# EAGLE board stm v0.5 (EAGLE 9.4.2), part 1 of 2
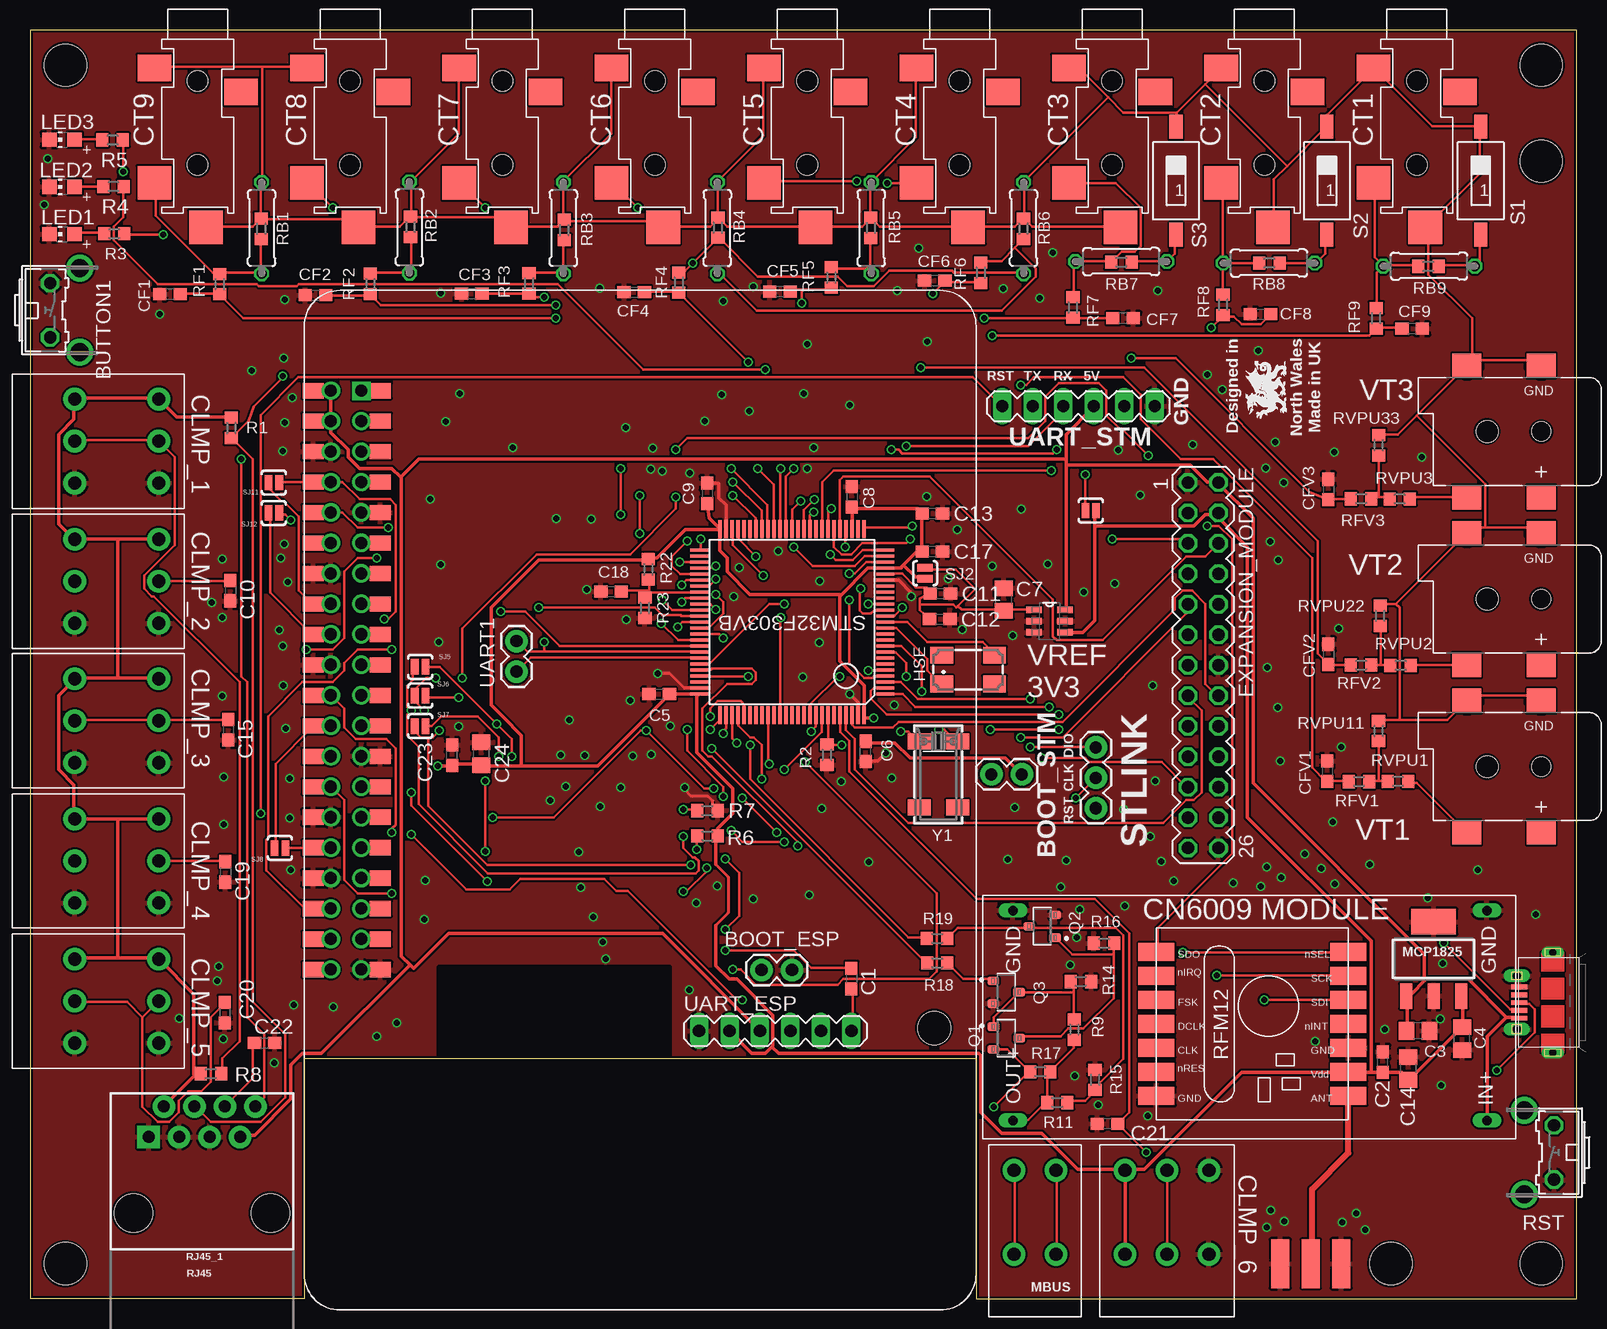
[diagram p0: board, top side]
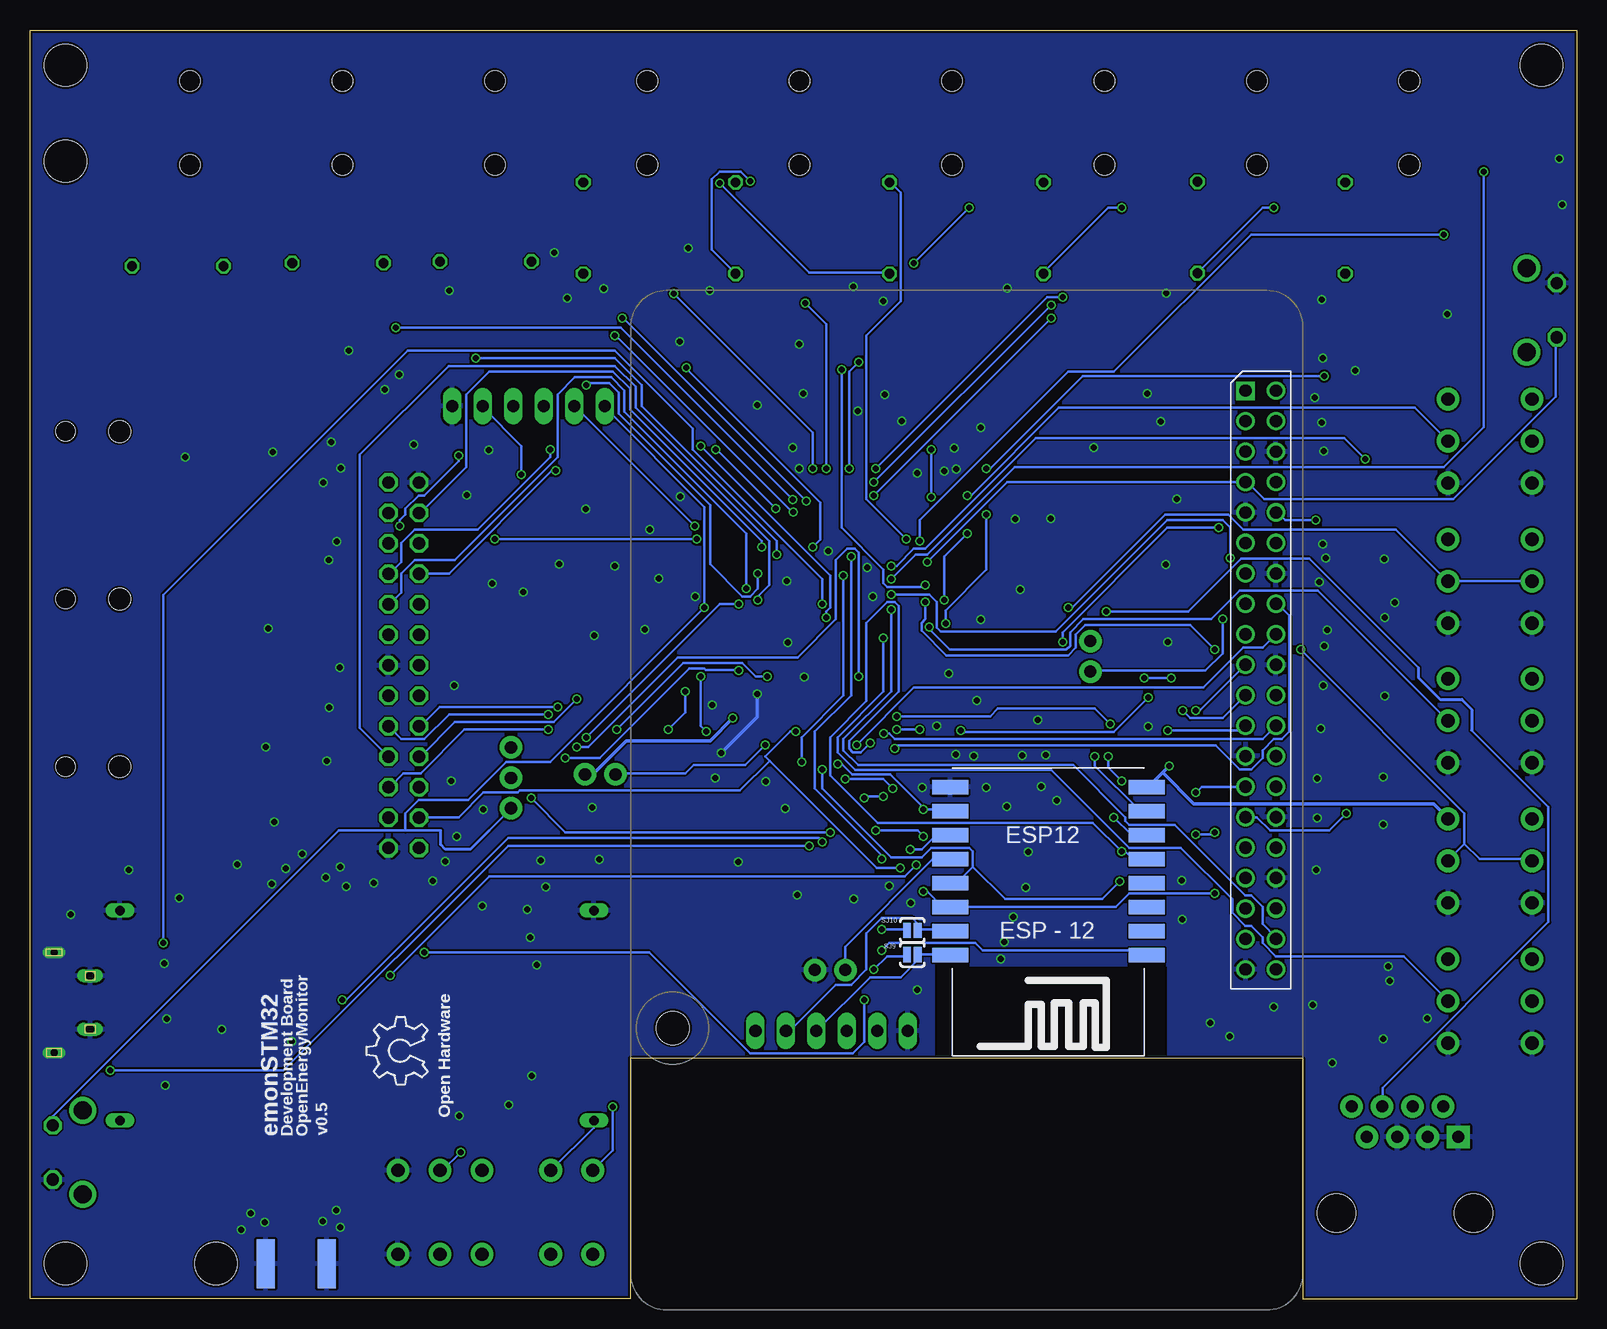
[diagram p1: board, bottom side, seen from below]

Size 128.91 x 105.79 mm. Coordinates in mm from the lower left corner, seen from the top.
Outline: 128.91,105.79 0,105.79 0,0 22.86,0 22.86,20.07 78.87,20.07 78.87,0 128.91,0 128.91,105.79
Copper layers (1*16): Top 0.035mm / dielectric 1.53mm / Bottom 0.035mm
Design rules "ragworm": minimum track width 7mil, minimum drill 0.5mm, track to track 6mil, track to pad 6mil, pad to pad 7mil, via to via 8mil, smd to smd 0mil, copper to edge 8mil, drill to drill 10mil, minimum pad ring 3mil, minimum via ring 3mil, stop-mask expansion 2mil, vias tented up to drill 25mil, thermal gap 8mil
Net classes: 0 default: width 0.203 mm, drill 0.5 mm, clearance 0.152 mm; 1 power: width 0.254 mm, drill 0.5 mm, clearance 0.152 mm; 2 gnd: width 0.203 mm, drill 0.5 mm, clearance 0.152 mm
Holes 3.5 mm at 125.95,102.85 2.95,102.85 2.95,2.95 125.95,2.95 125.95,94.85 113.41,2.95
tRestrict: area 34,19.3 to 53.3,27.7
bRestrict: area 34.2,19.3 to 53.5,27.7

## Footprints (pad centres in the part's own frame; a part is rotated, then mirrored left to right if it is on the bottom)
OMNIMATE_LSF_2 = drill 1.1 pad 1.9: P$1 -3.5,-3.5; P$2 -3.5,3.5; P$3 0,-3.5; P$4 0,3.5
OMNIMATE_LSF_3 = drill 1.1 pad 1.9: P$1 -3.5,-3.5; P$2 -3.5,3.5; P$3 0,-3.5; P$4 0,3.5; P$5 3.5,-3.5; P$6 3.5,3.5
1X02 = drill 1.016 pad 1.88: 1 0,0; 2 2.54,0
B3F-31XX = drill 1.016 octagon: 1 -2.261,-1.245; 2 2.261,-1.245 | drill 1.499 pad 2.159: 3 -3.505,1.245; 4 3.505,1.245
C0603 = smd 1.1 x 1: 1 -0.85,0; 2 0.85,0
C0805 = smd 1.3 x 1.5: 1 -0.95,0; 2 0.95,0
STEREO_SMT = smd 2.8 x 2.2: P$1 -3.6,-2.4; P$3 3.6,-4.4 | smd 2.8 x 2.8: P$2 -3.6,-12; P$4 0.7,-15.7 | hole 1.7: 0,-3.5; 0,-10.5
ESP12-SMD = smd 3 x 1.2: ADC -8.3,3.8; CH_PD -8.3,1.8; GND 8.1,-8.2; GPIO0 8.1,-2.2; GPIO2 8.1,-4.2; GPIO4 8.1,-0.2; GPIO5 8.1,1.8; GPIO12 -8.3,-4.2; GPIO13 -8.3,-6.2; GPIO14 -8.3,-2.2; GPIO15 8.1,-6.2; GPIO16 -8.3,-0.2; RESET -8.3,5.8; RXD0 8.1,3.8; TXD0 8.1,5.8; VCC -8.3,-8.2
MA13-2 = drill 1.016 octagon: 1 -15.24,-1.27; 2 -15.24,1.27; 3 -12.7,-1.27; 4 -12.7,1.27; 5 -10.16,-1.27; 6 -10.16,1.27; 7 -7.62,-1.27; 8 -7.62,1.27; 9 -5.08,-1.27; 10 -5.08,1.27; 11 -2.54,-1.27; 12 -2.54,1.27; 13 0,-1.27; 14 0,1.27; 15 2.54,-1.27; 16 2.54,1.27; 17 5.08,-1.27; 18 5.08,1.27; 19 7.62,-1.27; 20 7.62,1.27; 21 10.16,-1.27; 22 10.16,1.27; 23 12.7,-1.27; 24 12.7,1.27; 25 15.24,-1.27; 26 15.24,1.27
CTS406 = smd 1.9 x 1.4: 1 -2.2,-1.2; 2 2.2,-1.2; 3 2.2,1.2; 4 -2.2,1.2
SMA-EDGE = smd 1.524 x 4.064: GND@0 0,0; GND@1 5.08,0; SIG 2.54,0 | smd 1.524 x 4.064 bottom: GND@2 0,0; GND@3 5.08,0
CHIP-LED0805 = smd 1.2 x 1.2: A 0,-1.05; C 0,1.05
SOT-223 = smd 1 x 2.1: 1 -2.3,-3.1; 2 0,-3.1; 3 2.3,-3.1 | smd 3.7 x 2.1: 4 0,3.1
RPI3MIRROR2 = drill 1.016 square: P$1 8.37,4.775 | drill 1.016: P$2 8.357,2.233; P$3 10.897,4.773; P$4 10.897,2.233; P$5 13.437,4.773; P$6 13.437,2.233; P$7 15.977,4.773; P$8 15.977,2.233; P$9 18.517,4.773; P$10 18.517,2.233; P$11 21.057,4.773; P$12 21.057,2.233; P$13 23.597,4.773; P$14 23.597,2.233; P$15 26.137,4.773; P$16 26.137,2.233; P$17 28.677,4.773; P$18 28.677,2.233; P$19 31.217,4.773; P$20 31.217,2.233; P$21 33.757,4.773; P$22 33.757,2.233; P$23 36.297,4.773; P$24 36.297,2.233; P$25 38.837,4.773; P$26 38.837,2.233; P$27 41.377,4.773; P$28 41.377,2.233; P$29 43.917,4.773; P$30 43.917,2.233; P$31 46.457,4.773; P$32 46.457,2.233; P$33 48.997,4.773; P$34 48.997,2.233; P$35 51.537,4.773; P$36 51.537,2.233; P$37 54.077,4.773; P$38 54.077,2.233; P$39 56.617,4.773; P$40 56.617,2.233 | smd 1.27 x 1.778: P$41 8.371,6.351; P$42 8.371,0.763; P$43 10.911,6.351; P$44 10.911,0.763; P$45 13.451,6.351; P$46 13.451,0.763; P$47 15.991,6.351; P$48 15.991,0.763; P$49 18.531,6.351; P$50 18.531,0.763; P$51 21.071,6.351; P$52 21.071,0.763; P$53 23.611,6.351; P$54 23.611,0.763; P$55 26.151,6.351; P$56 26.151,0.763; P$57 28.691,6.351; P$58 28.691,0.763; P$59 31.231,6.351; P$60 31.231,0.763; P$61 33.771,6.351; P$62 33.771,0.763; P$63 36.311,6.351; P$64 36.311,0.763; P$65 38.851,6.351; P$66 38.851,0.763; P$67 41.391,6.351; P$68 41.391,0.763; P$69 43.931,6.351; P$70 43.931,0.763; P$71 46.471,6.351; P$72 46.471,0.763; P$73 49.011,6.351; P$74 49.011,0.763; P$75 51.551,6.351; P$76 51.551,0.763; P$77 54.091,6.351; P$78 54.091,0.763; P$79 56.631,6.351; P$80 56.631,0.763 | hole 2.75: 61.5,52.505
SOT23 = smd 0.71 x 0.96: 1 -0.95,-1.075; 2 0.95,-1.075; 3 0,1.075
R0603 = smd 1 x 1.1: 1 -0.85,0; 2 0.85,0
0207/7 = drill 0.813 octagon: 1 -3.81,0; 2 3.81,0
RFM12 = smd 1.5 x 3: 1 -5,-10; 2 -3,-10; 3 -1,-10; 4 1,-10; 5 3,-10; 6 5,-10; 7 7,-10; 8 7,6; 9 5,6; 10 3,6; 11 1,6; 12 -1,6; 13 -3,6; 14 -5,6
RJ45-8 = drill 1 pad 1.88 square: 1 -4.445,6.35 | drill 1 pad 1.88: 2 -3.175,8.89; 3 -1.905,6.35; 4 -0.635,8.89; 5 0.635,6.35; 6 1.905,8.89; 7 3.175,6.35; 8 4.445,8.89 | hole 3.2: -5.715,0; 5.715,0
SMS-001 = smd 1.092 x 2.007: 1 0,-4.496; 2 0,4.496
SJ_2S-NO = smd 0.635 x 1.27: 1 -0.45,0; 2 0.45,0
1X03 = drill 1.016 pad 1.88: 1 0,0; 2 2.54,0; 3 5.08,0
TQFP100 = smd 0.27 x 1.5: 1 -6,-7.75; 2 -5.5,-7.75; 3 -5,-7.75; 4 -4.5,-7.75; 5 -4,-7.75; 6 -3.5,-7.75; 7 -3,-7.75; 8 -2.5,-7.75; 9 -2,-7.75; 10 -1.5,-7.75; 11 -1,-7.75; 12 -0.5,-7.75; 13 0,-7.75; 14 0.5,-7.75; 15 1,-7.75; 16 1.5,-7.75; 17 2,-7.75; 18 2.5,-7.75; 19 3,-7.75; 20 3.5,-7.75; 21 4,-7.75; 22 4.5,-7.75; 23 5,-7.75; 24 5.5,-7.75; 25 6,-7.75; 51 6,7.75; 52 5.5,7.75; 53 5,7.75; 54 4.5,7.75; 55 4,7.75; 56 3.5,7.75; 57 3,7.75; 58 2.5,7.75; 59 2,7.75; 60 1.5,7.75; 61 1,7.75; 62 0.5,7.75; 63 0,7.75; 64 -0.5,7.75; 65 -1,7.75; 66 -1.5,7.75; 67 -2,7.75; 68 -2.5,7.75; 69 -3,7.75; 70 -3.5,7.75; 71 -4,7.75; 72 -4.5,7.75; 73 -5,7.75; 74 -5.5,7.75; 75 -6,7.75 | smd 1.5 x 0.27: 26 7.75,-6; 27 7.75,-5.5; 28 7.75,-5; 29 7.75,-4.5; 30 7.75,-4; 31 7.75,-3.5; 32 7.75,-3; 33 7.75,-2.5; 34 7.75,-2; 35 7.75,-1.5; 36 7.75,-1; 37 7.75,-0.5; 38 7.75,0; 39 7.75,0.5; 40 7.75,1; 41 7.75,1.5; 42 7.75,2; 43 7.75,2.5; 44 7.75,3; 45 7.75,3.5; 46 7.75,4; 47 7.75,4.5; 48 7.75,5; 49 7.75,5.5; 50 7.75,6; 76 -7.75,6; 77 -7.75,5.5; 78 -7.75,5; 79 -7.75,4.5; 80 -7.75,4; 81 -7.75,3.5; 82 -7.75,3; 83 -7.75,2.5; 84 -7.75,2; 85 -7.75,1.5; 86 -7.75,1; 87 -7.75,0.5; 88 -7.75,0; 89 -7.75,-0.5; 90 -7.75,-1; 91 -7.75,-1.5; 92 -7.75,-2; 93 -7.75,-2.5; 94 -7.75,-3; 95 -7.75,-3.5; 96 -7.75,-4; 97 -7.75,-4.5; 98 -7.75,-5; 99 -7.75,-5.5; 100 -7.75,-6
BOOST = drill 0.8 long: IN+ 17.5,39.5; OUT+ 17.5,0; P$1 0,0; P$2 0,39.5
MA06-1 = drill 1.016 long: 1 -6.35,0; 2 -3.81,0; 3 -1.27,0; 4 1.27,0; 5 3.81,0; 6 6.35,0
47589-0001 = smd 1.35 x 0.4: 1 2.8,1.3; 2 2.8,0.65; 3 2.8,0; 4 2.8,-0.65; 5 2.8,-1.3 | drill 0.6 pad 0.95 long: CASING1 0,4.175; CASING2 0,-4.175 | drill 0.7 pad 1.1 long: CASING3 3,2.225; CASING4 3,-2.225
SOT95P280X145-6N = smd 1.27 x 0.559: 1 -1.295,0.94; 2 -1.295,0; 3 -1.295,-0.94; 4 1.295,-0.94; 5 1.295,0; 6 1.295,0.94
DCJACK_2MM_SMT = smd 2.4 x 2: GND 0,-5.5; GNDBREAK 6.2,-5.5; PWR1 0,5.5; PWR2 6.2,5.5 | hole 1.6: 0,0 | hole 1.8: 4.5,0
CRYSTAL_8X3.8 = smd 1.3 x 1.9: P$1 -2.75,-1.6; P$2 2.75,-1.6; P$3 2.75,1.6; P$4 -2.75,1.6

## Placement (x,y rotation side)
2POLE_MBUS  OMNIMATE_LSF_2  [OMNIMATE_LSF_2]  85.5,7.24 0 top
3POLE_1  OMNIMATE_LSF_3  [OMNIMATE_LSF_3]  7.23,71.51 270 top
3POLE_2  OMNIMATE_LSF_3  [OMNIMATE_LSF_3]  7.23,59.83 270 top
3POLE_3  OMNIMATE_LSF_3  [OMNIMATE_LSF_3]  7.23,48.2 270 top
3POLE_4  OMNIMATE_LSF_3  [OMNIMATE_LSF_3]  7.23,36.52 270 top
3POLE_5  OMNIMATE_LSF_3  [OMNIMATE_LSF_3]  7.23,24.83 270 top
3POLE_6  OMNIMATE_LSF_3  [OMNIMATE_LSF_3]  94.74,7.24 0 top
BOOT_ESP  [1X02]  60.96,27.43 0 top
BOOT_STM  [1X02]  80.12,43.74 0 top
BUTTON1  [B3F-31XX]  2.92,82.42 270 top
C1  100nF  [C0603]  68.45,26.72 270 top
C2  100nF  [C0603]  112.73,19.75 90 top
C3  4.7uF  [C0805]  115.67,22.35 180 top
C4  4.7uF  [C0805]  119.33,21.71 90 top
C5  100nF  [C0603]  52.44,50.42 0 top
C6  100nF  [C0603]  69.63,45.66 90 top
C7  1uF  [C0805]  81.16,58.31 90 top
C8  100nF  [C0603]  68.49,66.87 270 top
C9  100nF  [C0603]  56.43,67.16 270 top
C10  100nF  [C0603]  16.7,59.06 270 top
C11  10nF  [C0603]  75.86,58.81 0 top
C12  1uF  [C0603]  75.81,56.68 0 top
C13  10nF  [C0603]  75.19,65.49 0 top
C14  1uF  [C0805]  114.87,19.22 90 top
C15  100nF  [C0603]  16.53,47.45 270 top
C17  1uF  [C0603]  75.19,62.32 0 top
C18  10uF  [C0603]  48.43,58.97 0 top
C19  100nF  [C0603]  16.29,35.6 270 top
C20  100nF  [C0603]  16.22,23.88 270 top
C21  100nF  [C0603]  89.79,14.61 180 top
C22  100nF  [C0603]  19.56,21.34 0 top
C23  100nF  [C0603]  35.17,45.33 90 top
C24  47uF  [C0805]  37.62,45.47 90 top
CF1  100nF  [C0603]  11.67,83.78 0 top
CF2  100nF  [C0603]  23.79,83.69 0 top
CF3  100nF  [C0603]  36.81,83.8 0 top
CF4  100nF  [C0603]  50.35,83.94 0 top
CF5  100nF  [C0603]  62.49,83.99 0 top
CF6  100nF  [C0603]  75.4,84.9 0 top
CF7  100nF  [C0603]  91.09,81.75 180 top
CF8  100nF  [C0603]  102.54,82.1 0 top
CF9  100nF  [C0603]  115.18,80.88 180 top
CFV1  100nF  [C0603]  108.1,44 270 top
CFV2  100nF  [C0603]  108.2,53.74 270 top
CFV3  100nF  [C0603]  108.2,67.49 270 top
CT1  STEREO_SMD  [STEREO_SMT]  115.57,105.04 0 top
CT2  STEREO_SMD  [STEREO_SMT]  102.87,105.04 0 top
CT3  STEREO_SMD  [STEREO_SMT]  90.17,105.04 0 top
CT4  STEREO_SMD  [STEREO_SMT]  77.47,105.04 0 top
CT5  STEREO_SMD  [STEREO_SMT]  64.77,105.04 0 top
CT6  STEREO_SMD  [STEREO_SMT]  52.07,105.04 0 top
CT7  STEREO_SMD  [STEREO_SMT]  39.37,105.04 0 top
CT8  STEREO_SMD  [STEREO_SMT]  26.67,105.04 0 top
CT9  STEREO_SMD  [STEREO_SMT]  13.97,105.04 0 top
ESP12  [ESP12-SMD]  44.13,34.47 180 bottom
EXPANSION_MODULE  [MA13-2]  97.77,52.83 270 top
HSE  8MHZ ~15pFmax  [CTS406]  78.18,52.47 0 top
J$1  SMA_EDGE  [SMA-EDGE]  104.18,2.93 0 top
LED1  Red 1.85V  [CHIP-LED0805]  2.67,88.77 90 top
LED2  Red 1.85V  [CHIP-LED0805]  2.67,92.71 90 top
LED3  Red 1.85V  [CHIP-LED0805]  2.67,96.65 90 top
LOGO1  OSHW_LOGO_6MILX0200-NT  [OSHW_6X200_NOTEXT]  95.78,17.86 90 bottom
MCP1825  MCP1825SOT-223-3  [SOT-223]  116.97,28.35 0 top
PCB2  RPI3YA  [RPI3MIRROR2]  22.84,84.09 270 top
Q1  MMBT3906  [SOT23]  81.37,21.75 270 top
Q2  MMBT3904  [SOT23]  84.34,31.07 90 top
Q3  MMBT3904  [SOT23]  81.34,25.58 270 top
R1  4.7k  [R0603]  16.77,72.61 90 top
R2  10k  [R0603]  66.42,45.36 270 top
R3  220R  [R0603]  7.02,88.8 0 top
R4  220R  [R0603]  6.96,92.74 0 top
R5  220R  [R0603]  6.89,96.62 0 top
R6  10k  [R0603]  56.45,38.6 0 top
R7  10k  [R0603]  56.45,40.71 0 top
R8  4.7k  [R0603]  15.07,18.78 180 top
R9  39K  [R0603]  87.03,22.46 270 top
R11  33K  [R0603]  85.61,16.38 180 top
R14  22K  [R0603]  87.57,26.46 180 top
R15  3k3  [R0603]  88.75,18.27 270 top
R16  82R  [R0603]  89.51,29.66 0 top
R17  220K  [R0603]  84.19,18.95 0 top
R18  1K  [R0603]  75.6,28.01 180 top
R19  1K  [R0603]  75.6,30.06 180 top
R22  10k  [R0603]  51.53,60.82 90 top
R23  10k  [R0603]  51.24,57.61 90 top
RB1  22r  [R0603]  19.27,89.22 90 top
RB2  22r  [R0603]  31.71,89.37 90 top
RB3  22r  [R0603]  44.52,89.12 90 top
RB4  22r  [R0603]  57.33,89.31 90 top
RB5  22r  [R0603]  70.07,89.29 90 top
RB6  22r  [R0603]  82.78,89.22 90 top
RB7  22r  [R0603]  90.95,86.43 0 top
RB8  22r  [R0603]  103.28,86.36 0 top
RB9  22r  [R0603]  116.53,86.08 0 top
RB10  22r  [0207/7]  19.3,89.28 90 top
RB11  22r  [0207/7]  31.62,89.33 90 top
RB12  22r  [0207/7]  44.45,89.28 90 top
RB13  22r  [0207/7]  57.28,89.28 90 top
RB14  22r  [0207/7]  70.1,89.28 90 top
RB15  22r  [0207/7]  82.8,89.28 90 top
RB16  22r  [0207/7]  90.93,86.49 0 top
RB17  22r  [0207/7]  103.25,86.36 0 top
RB18  22r  [0207/7]  116.59,86.11 0 top
RF1  330R  [R0603]  15.81,84.6 270 top
RF2  330R  [R0603]  28.36,84.62 270 top
RF3  330R  [R0603]  41.59,84.66 270 top
RF4  330R  [R0603]  54.07,84.73 270 top
RF5  330R  [R0603]  66.78,85.16 270 top
RF6  330R  [R0603]  79.24,85.55 270 top
RF7  330R  [R0603]  86.91,82.65 270 top
RF8  330R  [R0603]  99.42,82.89 270 top
RF9  330R  [R0603]  112.18,81.76 270 top
RFM69HCW  RFM12_SMDSMD  [RFM12]  103.86,23.92 270 top
RFV1  330R  [R0603]  110.75,43.13 180 top
RFV2  330R  [R0603]  110.93,52.85 180 top
RFV3  330R  [R0603]  110.92,66.72 180 top
RJ45_1  RJ45  [RJ45-8]  14.33,7.17 0 top
RST  [B3F-31XX]  125.76,12.21 90 top
RVPU1  120k  [R0603]  114,43.15 0 top
RVPU2  120k  [R0603]  114.22,52.82 0 top
RVPU3  120k  [R0603]  114.15,66.7 180 top
RVPU11  10k  [R0603]  112.38,47.36 90 top
RVPU22  10k  [R0603]  112.52,56.96 90 top
RVPU33  10k  [R0603]  112.39,71.18 90 top
S1  SWS001  [SMS-001]  120.9,93.22 0 top
S2  SWS001  [SMS-001]  108.08,93.22 0 top
S3  SWS001  [SMS-001]  95.5,93.22 0 top
SJ1  SOLDERJUMPERNO  [SJ_2S-NO]  88.4,65.73 0 top
SJ2  SOLDERJUMPERNO  [SJ_2S-NO]  74.59,60.5 90 top
SJ5  SOLDERJUMPERNO  [SJ_2S-NO]  32.51,52.7 180 top
SJ6  SOLDERJUMPERNO  [SJ_2S-NO]  32.51,50.29 180 top
SJ7  SOLDERJUMPERNO  [SJ_2S-NO]  32.51,47.75 180 top
SJ8  SOLDERJUMPERNO  [SJ_2S-NO]  20.83,37.59 180 top
SJ9  SOLDERJUMPERNO  [SJ_2S-NO]  55.37,28.7 0 bottom
SJ10  SOLDERJUMPERNO  [SJ_2S-NO]  55.37,30.73 180 bottom
SJ11  SOLDERJUMPERNO  [SJ_2S-NO]  20.32,68.07 180 top
SJ12  SOLDERJUMPERNO  [SJ_2S-NO]  20.32,65.53 180 top
STLINK  [1X03]  88.82,45.99 270 top
STM32F303VB  STM32F303XB  [TQFP100]  63.5,56.44 90 top
U$2  BOOST_MODULE  [BOOST]  81.92,32.38 270 top
UART1  [1X02]  40.55,52.31 90 top
UART_ESP  [MA06-1]  62.1,22.35 0 top
UART_STM  [MA06-1]  87.37,74.43 180 top
USB_CONN  MICRO-USB-RECEPTACLE47589-0001  [47589-0001]  126.89,24.71 180 top
VREF_3V3  MCP1501T-33E  [SOT95P280X145-6N]  84.96,56.51 0 top
VT1  2.1MMJACKSMT  [DCJACK_2MM_SMT]  125.94,44.38 180 top
VT2  2.1MMJACKSMT  [DCJACK_2MM_SMT]  125.94,58.35 180 top
VT3  2.1MMJACKSMT  [DCJACK_2MM_SMT]  125.94,72.32 180 top
Y1  32.768kHz  [CRYSTAL_8X3.8]  75.7,43.73 270 top

## Library data of the parts
2POLE_MBUS 3POLE_1-3POLE_6 = OMNIMATE_LSF
BOOT_ESP BOOT_STM SJ1 SJ2 SJ5-SJ12 STLINK UART1 = SparkFun
BUTTON1 RST = switch-omron; MPN: B3F-3100; OC_FARNELL: 959704; OC_NEWARK: 36M3582
C1 C2 C5 C6 C8-C10 C12 C15 C17-C23 CF1-CF9 CFV1-CFV3 R1 R2 R6-R8 R22 R23 RB1-RB9 RF1-RF9 RFV1-RFV3 RVPU1-RVPU3 RVPU11 RVPU22 RVPU33 = resistor
C3 C4 C7 C11 C13 C14 C24 = rcl; SPICEPREFIX: C
CT1 = IotaWatt_parts; MPN: SJ-3523-SMT
CT2-CT9 = IotaWatt_parts
ESP12 = ESP8266 MODULES _ CORRECTED
EXPANSION_MODULE = con-lstb; OC_FARNELL: unknown; OC_NEWARK: unknown
HSE = crystal; OC_FARNELL: unknown; OC_NEWARK: unknown
J$1 = SparkFun-Connectors
LED1-LED3 VT1-VT3 = adafruit
LOGO1 = ohw-logo
MCP1825 = SteelCaveRobotics-Power
PCB2 = e14_Rpi3_RevA+mirror-pcb copy
Q1 = Transistor; CREATED_BY: PCB Layout; DIGIKEY_PART_NUMBER: MMBT3906FSCT-ND; MANUFACTURER: ON Semiconductor; MPN: MMBT3906; PACKAGE: SOT-23
Q2 Q3 = Transistor; CREATED_BY: PCB Layout; DIGIKEY_PART_NUMBER: MMBT3904FSCT-ND; MANUFACTURER: ON Semiconductor; MPN: MMBT3904; PACKAGE: SOT-23-3
R3-R5 R9 R11 R14-R19 RB10-RB18 = rcl; SPICEPREFIX: R
RFM69HCW = rfm12b _ rfm69cw
RJ45_1 = SparkFun-Connectors; PROD_ID: CONN-08506; SF_ID: PRT-00643
S1 = smd-special; MPN: SDA01H1SBD
S2 S3 = smd-special
STM32F303VB = stm32f303
U$2 = BOOST MODULE CN6009
UART_ESP UART_STM = con-lstb-db; OC_FARNELL: unknown; OC_NEWARK: unknown
USB_CONN = con-molex-usb
VREF_3V3 = MCP1501T-33E
Y1 = microbuilder

## Nets
24V: 2POLE_MBUS.P$3 2POLE_MBUS.P$4 R9.2 R11.2 R17.2 U$2.OUT+
+3V3 [power]: 3POLE_1.P$1 3POLE_1.P$2 3POLE_2.P$1 3POLE_2.P$2 3POLE_3.P$1 3POLE_3.P$2 3POLE_4.P$1 3POLE_4.P$2 3POLE_5.P$1 3POLE_5.P$2 3POLE_6.P$1 3POLE_6.P$2 BOOT_STM.2 C2.1 C4.2 C5.2 C6.2 C8.2 C9.2 C13.1 C14.1 C17.1 C23.1 C24.1 ESP12.VCC EXPANSION_MODULE.4 MCP1825.3 R1.2 R6.2 R8.2 R22.2 RFM69HCW.9 RJ45_1.2 SJ1.2 SJ2.1 STM32F303VB.22 STM32F303VB.28 STM32F303VB.50 STM32F303VB.75 STM32F303VB.100 UART_ESP.2 VREF_3V3.4
+3V3_ADC: C7.1 C11.1 C12.1 SJ2.2 STM32F303VB.21 VREF_3V3.1
+5V [power]: C3.2 EXPANSION_MODULE.2 MCP1825.1 PCB2.P$2 PCB2.P$4 PCB2.P$42 PCB2.P$44 RJ45_1.7 U$2.IN+ UART_ESP.3 UART_STM.3 USB_CONN.1 VREF_3V3.6
AC1: RVPU1.2 VT1.PWR2
AC2: RVPU2.2 VT2.PWR2
AC3: RVPU3.1 VT3.PWR2
ADC0: RFV3.1 RVPU3.2 RVPU33.1
ADC_RJ45IN: RJ45_1.8 STM32F303VB.54
ANT [power]: J$1.SIG RFM69HCW.8
BIAS: CT1.P$1 CT1.P$4 CT2.P$1 CT2.P$4 CT3.P$1 CT3.P$4 CT4.P$1 CT4.P$4 CT5.P$1 CT5.P$4 CT6.P$1 CT6.P$4 CT7.P$1 CT7.P$4 CT8.P$1 CT8.P$4 CT9.P$1 CT9.P$4 RB1.2 RB2.2 RB3.2 RB4.2 RB5.2 RB6.2 RB10.2 RB11.2 RB12.2 RB13.2 RB14.2 RB15.2 RVPU11.2 RVPU22.2 RVPU33.2 S1.2 S2.2 S3.2 STM32F303VB.51 VT1.GND VT1.GNDBREAK VT2.GND VT2.GNDBREAK VT3.GND VT3.GNDBREAK
BIAS_IN: C18.2 R22.1 R23.2 STM32F303VB.58
BOOT0: BOOT_STM.1 R2.1 STM32F303VB.94
BUTTON1: BUTTON1.2 PCB2.P$7 PCB2.P$47 STM32F303VB.53
CS_RFM69: PCB2.P$22 PCB2.P$62 RFM69HCW.14
CT1: CF1.2 RF1.2 STM32F303VB.44
CT1_EX: EXPANSION_MODULE.3 STM32F303VB.29
CT2: CF2.2 RF2.2 STM32F303VB.43
CT2_EX: EXPANSION_MODULE.6 STM32F303VB.30
CT3: CF3.2 RF3.2 STM32F303VB.42
CT3_EX: EXPANSION_MODULE.5 STM32F303VB.31
CT4: CF4.2 RF4.2 STM32F303VB.41
CT4_EX: EXPANSION_MODULE.8 STM32F303VB.32
CT5: CF5.2 RF5.2 STM32F303VB.40
CT5_EX: EXPANSION_MODULE.7 STM32F303VB.33
CT6: CF6.2 RF6.2 STM32F303VB.39
CT6_EX: EXPANSION_MODULE.10 STM32F303VB.15
CT7: CF7.2 RF7.2 STM32F303VB.38
CT7_EX: EXPANSION_MODULE.9 STM32F303VB.16
CT8: CF8.2 RF8.2 STM32F303VB.36
CT9: CF9.2 RF9.2 STM32F303VB.35
D+: STM32F303VB.71 USB_CONN.3
D-: STM32F303VB.70 USB_CONN.2
DS18B20_2: 3POLE_1.P$3 3POLE_1.P$4 R8.1 STM32F303VB.61
DS18B20_RJ45: R1.1 RJ45_1.4 STM32F303VB.66
GND [power]: 3POLE_1.P$5 3POLE_1.P$6 3POLE_2.P$5 3POLE_2.P$6 3POLE_3.P$5 3POLE_3.P$6 3POLE_4.P$5 3POLE_4.P$6 3POLE_5.P$5 3POLE_5.P$6 3POLE_6.P$5 3POLE_6.P$6 BOOT_ESP.2 BUTTON1.1 C2.2 C3.1 C4.1 C5.1 C6.1 C7.2 C8.1 C9.1 C10.2 C11.2 C12.2 C13.2 C14.2 C15.2 C17.2 C18.1 C19.2 C20.2 C21.2 C22.2 C23.2 C24.2 CF1.1 CF2.1 CF3.1 CF4.1 CF5.1 CF6.1 CF7.1 CF8.1 CF9.1 CFV1.1 CFV2.1 CFV3.1 ESP12.GND EXPANSION_MODULE.1 EXPANSION_MODULE.14 EXPANSION_MODULE.26 J$1.GND@0 J$1.GND@1 J$1.GND@2 J$1.GND@3 LED1.C LED2.C LED3.C MCP1825.2 MCP1825.4 PCB2.P$6 PCB2.P$9 PCB2.P$14 PCB2.P$20 PCB2.P$25 PCB2.P$30 PCB2.P$34 PCB2.P$39 PCB2.P$46 PCB2.P$49 PCB2.P$54 PCB2.P$60 PCB2.P$65 PCB2.P$70 PCB2.P$74 PCB2.P$79 Q2.2 Q3.2 R2.2 R7.2 R14.1 R15.1 R16.1 R23.1 RFM69HCW.7 RFM69HCW.10 RJ45_1.1 RJ45_1.3 RJ45_1.5 RST.1 STM32F303VB.20 STM32F303VB.49 STM32F303VB.74 STM32F303VB.99 U$2.P$1 U$2.P$2 UART_ESP.1 UART_STM.1 USB_CONN.5 USB_CONN.CASING1 USB_CONN.CASING2 USB_CONN.CASING3 USB_CONN.CASING4 VREF_3V3.2 VREF_3V3.3 VREF_3V3.5
HSE_IN: HSE.1 STM32F303VB.12
HSE_OUT: HSE.3 STM32F303VB.13
I010_EX: EXPANSION_MODULE.24
I011_EX: EXPANSION_MODULE.25
IO1_EX: EXPANSION_MODULE.15 STM32F303VB.97
IO2_EX: EXPANSION_MODULE.16 STM32F303VB.98
IO3_EX: EXPANSION_MODULE.17 STM32F303VB.1
IO4_EX: EXPANSION_MODULE.18 STM32F303VB.2
IO5_EX: EXPANSION_MODULE.19 STM32F303VB.3
IO6_EX: EXPANSION_MODULE.20 STM32F303VB.4
IO7_EX: EXPANSION_MODULE.21 STM32F303VB.5
IO8_EX: EXPANSION_MODULE.22 STM32F303VB.91
IO11_EX: STM32F303VB.95
LED1: R3.2 STM32F303VB.55
LED2: R4.2 STM32F303VB.56
LED3: R5.2 STM32F303VB.57
MBUS_RX: PCB2.P$16 PCB2.P$56 R18.2 SJ11.2
MBUS_TX: PCB2.P$18 PCB2.P$58 R19.2 SJ12.2
MISO: PCB2.P$21 PCB2.P$61 RFM69HCW.1 SJ6.2
MOSI: PCB2.P$19 PCB2.P$59 RFM69HCW.12 SJ5.2
N$1: SJ1.1 UART_STM.2
N$2: CT9.P$2 RB1.1 RB10.1 RF1.1
N$5: LED2.A R4.1
N$6: LED3.A R5.1
N$7: BOOT_ESP.1 ESP12.GPIO0
N$8: CT8.P$2 RB2.1 RB11.1 RF2.1
N$10: CT7.P$2 RB3.1 RB12.1 RF3.1
N$11: ESP12.GPIO2 R6.1
N$12: USB_CONN.4
N$13: PCB2.P$26 PCB2.P$66
N$16: PCB2.P$32 PCB2.P$72 SJ8.1
N$22: PCB2.P$1 PCB2.P$41
N$24: PCB2.P$17 PCB2.P$57
N$26: RB9.2 RB18.2 S1.1
N$27: RB8.2 RB17.2 S2.1
N$28: RB7.2 RB16.2 S3.1
N$29: 2POLE_MBUS.P$1 2POLE_MBUS.P$2 Q1.2 R17.1
N$30: Q1.3 Q2.1 R16.2
N$31: Q1.1 Q3.3 R9.1 R14.2
N$32: Q2.3 R11.1 R15.2 R19.1
N$33: Q3.1 R18.1
N$34: RFV2.1 RVPU2.1 RVPU22.1
N$37: RFV1.1 RVPU1.1 RVPU11.1
N$38: CT6.P$2 RB4.1 RB15.1 RF4.1
N$39: CT5.P$2 RB5.1 RB14.1 RF5.1
N$40: CT4.P$2 RB6.1 RB13.1 RF6.1
N$41: LED1.A R3.1
N$42: CT3.P$2 RB7.1 RB16.1 RF7.1
N$43: CT2.P$2 RB8.1 RB17.1 RF8.1
N$44: CT1.P$2 RB9.1 RB18.1 RF9.1
NRST: PCB2.P$29 PCB2.P$69 RST.2 STLINK.3 STM32F303VB.14 UART_STM.6
PC14: STM32F303VB.8 Y1.P$1
PC15: STM32F303VB.9 Y1.P$4
PULSE1_RJ45: C22.1 RJ45_1.6 STM32F303VB.67
PULSE2: 3POLE_5.P$3 3POLE_5.P$4 C20.1 STM32F303VB.65
PUSHIN_1: 3POLE_6.P$3 3POLE_6.P$4 C21.1 STM32F303VB.96
PUSHIN_2: 3POLE_2.P$3 3POLE_2.P$4 C10.1 STM32F303VB.62
PUSHIN_3: 3POLE_3.P$3 3POLE_3.P$4 C15.1 STM32F303VB.63
PUSHIN_4: 3POLE_4.P$3 3POLE_4.P$4 C19.1 STM32F303VB.64
RPI_GPIO16: PCB2.P$36 PCB2.P$76 STM32F303VB.59
RPI_GPIO20: PCB2.P$38 PCB2.P$78 STM32F303VB.60
RST_ESP_1: C1.2 UART_ESP.6
RST_ESP_2: C1.1 ESP12.RESET
SCK: ESP12.GPIO5 EXPANSION_MODULE.23 PCB2.P$28 PCB2.P$68 STM32F303VB.92
SDA: ESP12.GPIO4 PCB2.P$27 PCB2.P$67 STM32F303VB.93
SPI3_CLK: ESP12.GPIO14 SJ7.1 STM32F303VB.78
SPI3_CS: PCB2.P$24 PCB2.P$64 SJ8.2 STM32F303VB.77
SPI3_CS_ESP: ESP12.GPIO15 R7.1 STM32F303VB.84
SPI3_MISO: ESP12.GPIO12 SJ6.1 STM32F303VB.79
SPI3_MOSI: ESP12.GPIO13 SJ5.1 STM32F303VB.80
SPI_CLK: PCB2.P$23 PCB2.P$63 RFM69HCW.13 SJ7.2
SWCLK: STLINK.2 STM32F303VB.76
SWDIO: STLINK.1 STM32F303VB.72
UART1_RX: PCB2.P$8 PCB2.P$48 SJ11.1 STM32F303VB.69 UART1.1
UART1_TX: PCB2.P$10 PCB2.P$50 SJ12.1 STM32F303VB.68 UART1.2
UART_RX: STM32F303VB.86 UART_STM.4
UART_RX_ESP: ESP12.TXD0 SJ9.2 UART_ESP.4
UART_TX: STM32F303VB.26 UART_STM.5
UART_TX_ESP: ESP12.RXD0 SJ10.1 UART_ESP.5
USART3_RX: SJ9.1 STM32F303VB.48
USART3_TX: SJ10.2 STM32F303VB.47
VBAT: STM32F303VB.6
VSIG1: CFV1.2 RFV1.2 STM32F303VB.23
VSIG2: CFV2.2 RFV2.2 STM32F303VB.24
VSIG3: CFV3.2 RFV3.2 STM32F303VB.25
VSIG4: STM32F303VB.17
VSIG5: STM32F303VB.18
VSIG6: STM32F303VB.19
VT1_EX: EXPANSION_MODULE.11
VT2_EX: EXPANSION_MODULE.12
VT3_EX: EXPANSION_MODULE.13